# Altium PCB AirPort_V1.0.PcbDoc
Units mil, origin at the board's own origin, x right, y up, seen from the top; angles counter-clockwise.
Board outline 2235 x 1330 mil, 2 copper layers (Top Layer, Bottom Layer); 47 components, 18 nets, 128 pads, 94 vias.
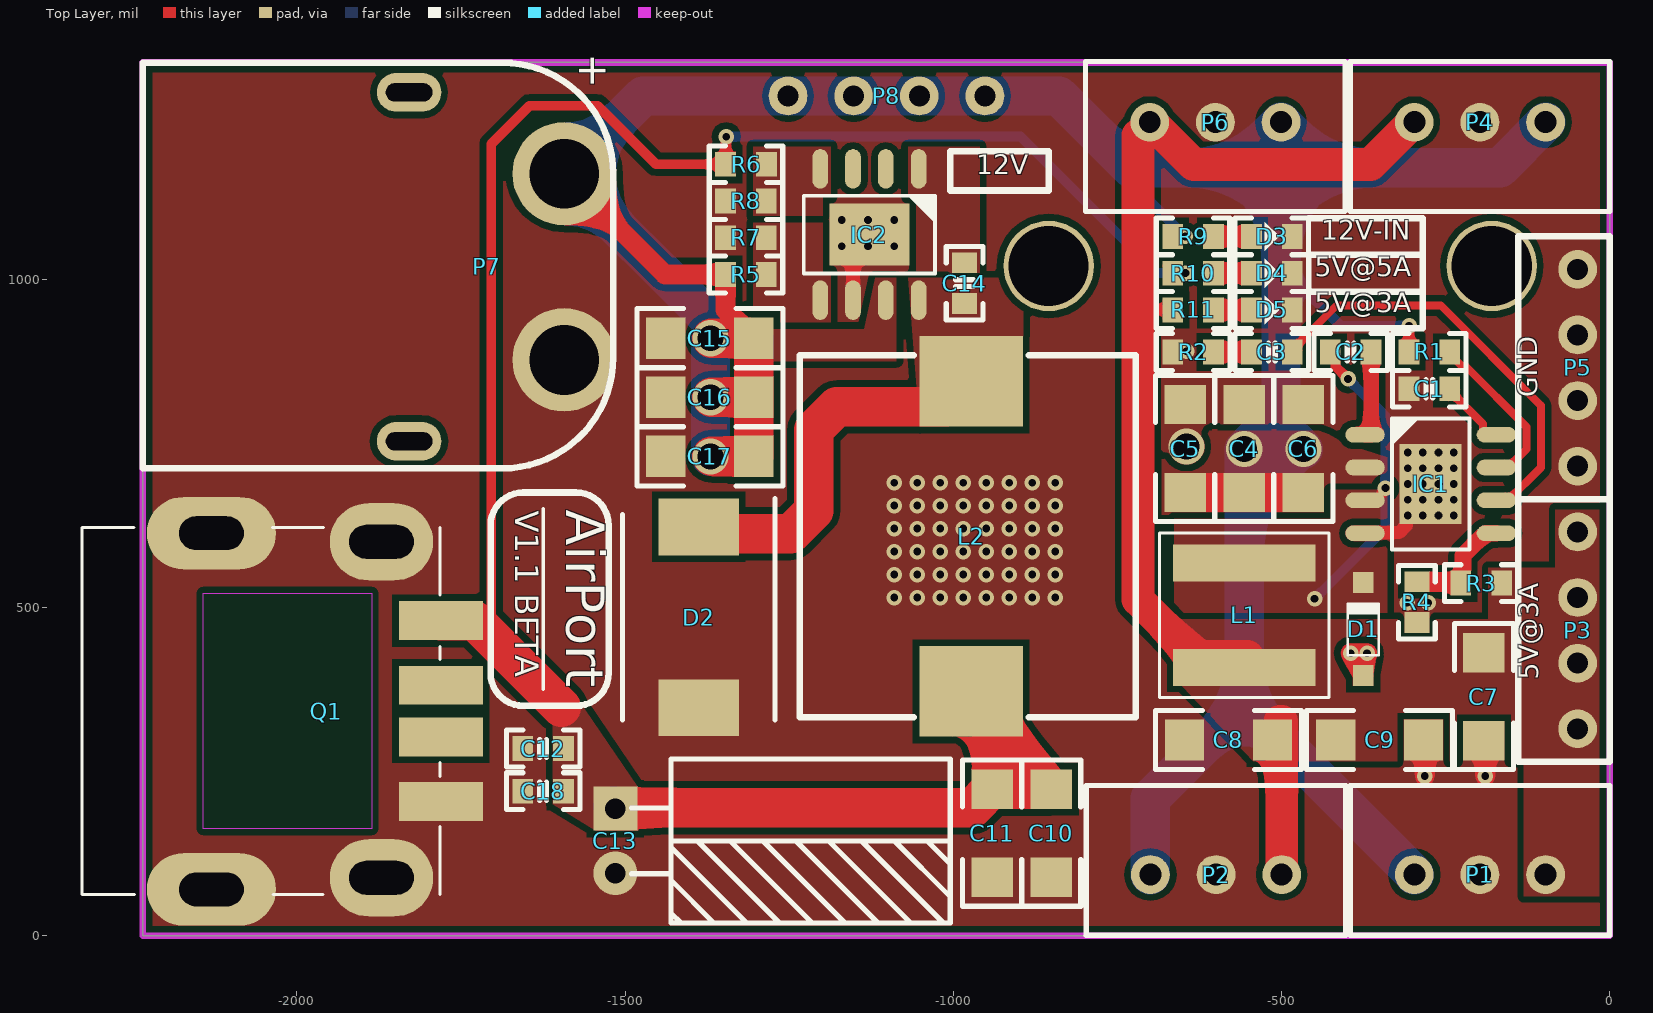
[diagram p0: Top Layer view]
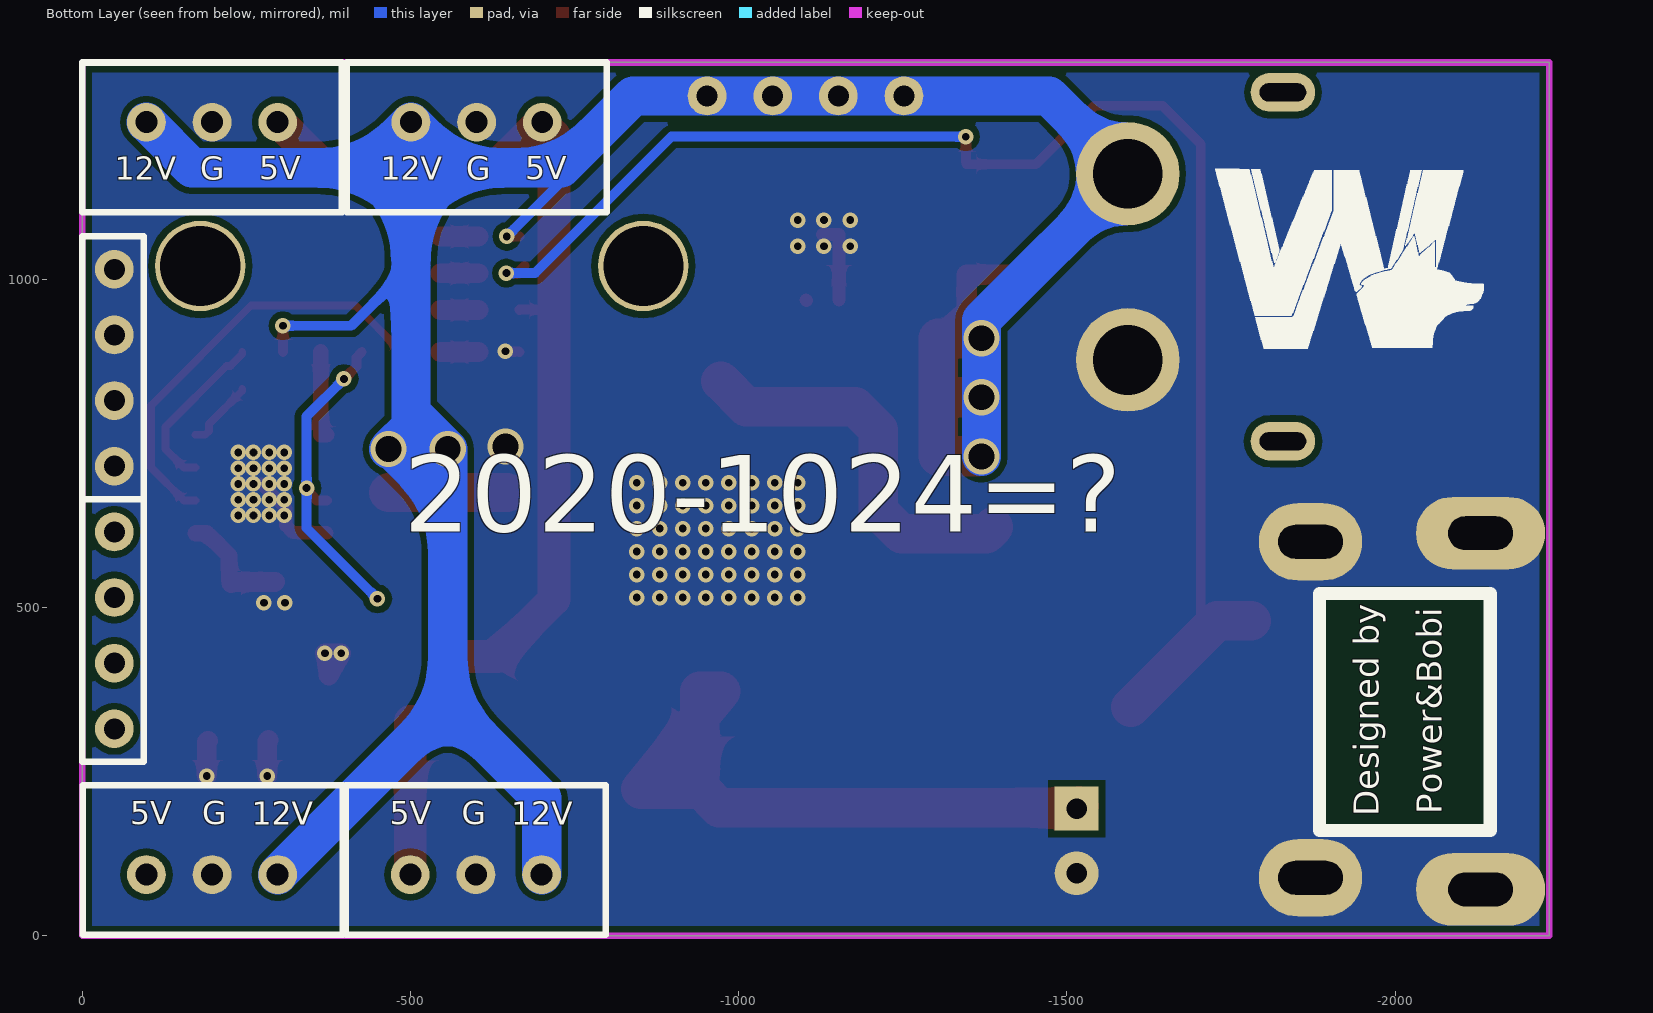
[diagram p1: Bottom Layer view, seen from below]
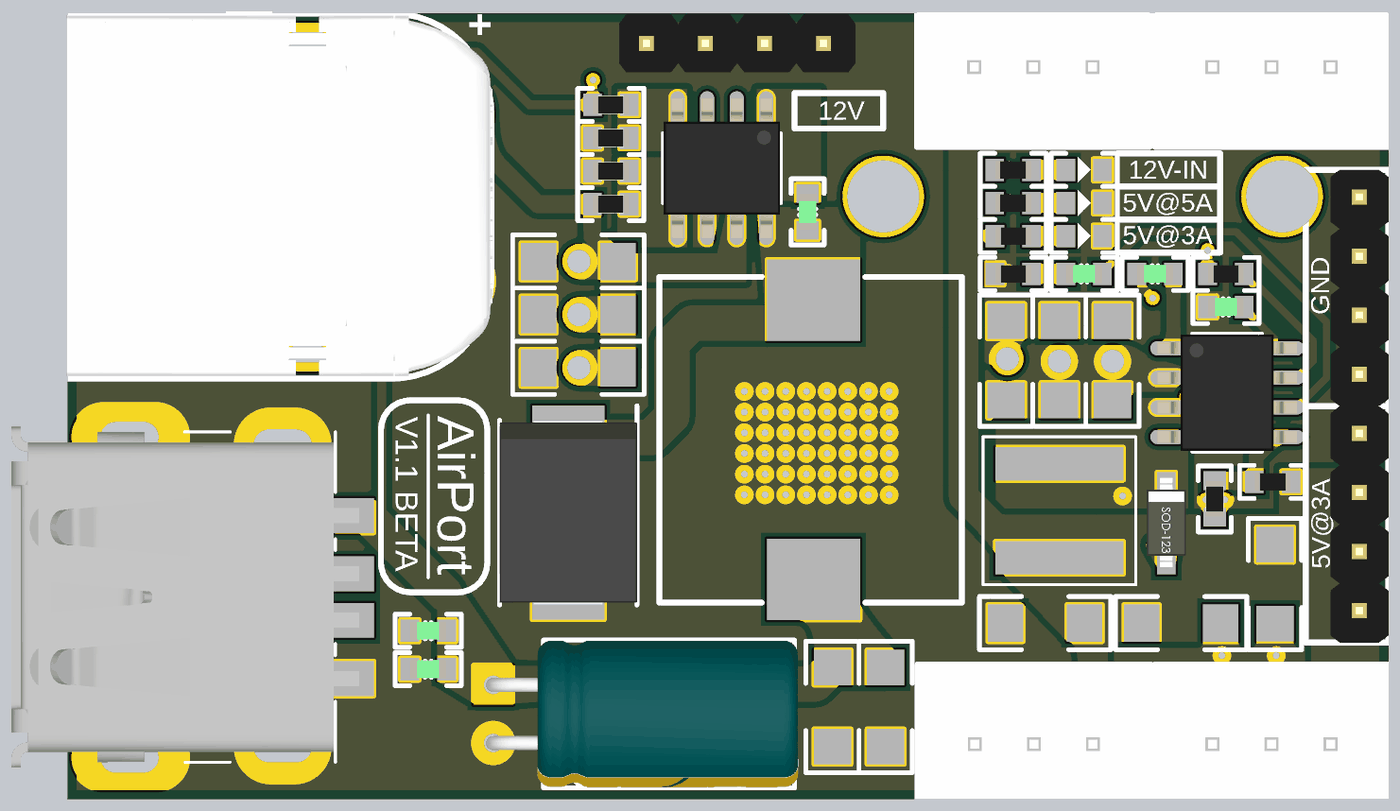
[diagram p2: 3D render of the assembled board from above, using the file's embedded part models]

## Layer stack, top to bottom
Top Solder: solder mask 0.4, Solder Resist, Dk 3.5
Top Layer: signal copper 1.4
Dielectric 1: dielectric 12.6, FR-4, Dk 4.8
Bottom Layer: signal copper 1.4
Bottom Solder: solder mask 0.4, Solder Resist, Dk 3.5

## Board outline
-2235,0 0,0 0,1330 -2235,1330

## Design rules (kind name [scope] priority, off if disabled: settings)
Clearance [All] p1: gap=10 ignorepadtopadclearanceinfootprint=FALSE except(0: Arc-Hole Track-Hole SMDPad-Hole THPad-Hole Via-Hole Fill-Hole Poly-Hole Region-Hole Text-Hole)
PlaneConnect [All] p1: planeconnectstyle=Direct reliefexpansion=20 reliefentries=4 reliefconductorwidth=10 reliefairgap=10
PolygonConnect [All] p1: connectstyle=Direct reliefconductorwidth=10 reliefentries=4 polygonreliefangle="90 Angle" airgapwidth=10
RoutingVias [All] p1: holewidth=11.81 width=23.62 viastyle="Through Hole" minholewidth=11.81 minwidth=23.62 maxholewidth=11.81 maxwidth=23.62
SolderMaskExpansion [All] p1: expansion=4 istentingtop=FALSE
Width [All] p1: maxlimit=100 minlimit=10 preferedwidth=15
29 further rules are at their usual default settings.

## Components (designator, comment, footprint, x,y, rotation, side; value= is the part's Value field where it differs from the comment)
C1 "100nF" CAP-0603 -275.1,833 r0 top
C2 "10nF" CAP-0603 -395,889 r0 top
C3 "6.8nF" CAP-0603 -515,889 r0 top
C4 "10uF" CAP-1206 -557,741.93 r270 top
C5 "10uF" CAP-1206 -647,741.93 r270 top
C6 "10uF" CAP-1206 -467,741.93 r270 top
C7 "10uF" CAP-1206 -192,364.05 r90 top
C8 "10uF" CAP-1206 -581,298 r0 top
C9 "10uF" CAP-1206 -351,298 r180 top
C10 "10uF" CAP-1206 -851,156.07 r90 top
C11 "10uF" CAP-1206 -941,156.07 r90 top
C12 "0.01uF" CAP-0603 -1625,285 r0 top
C13 "330uF" "CAP-2.5*6.3*11.2-H - GD" -1515,144.21 r270 top
C14 "0.01uF" CAP-0603 -983,993.87 r90 top
C15 "4.7uF" CAP-1206 -1371,910 r0 top
C16 "4.7uF" CAP-1206 -1371,820 r0 top
C17 "0.01uF" CAP-1206 -1371,730 r0 top
C18 "0.01uF" CAP-0603 -1625,220 r0 top
D1 "1N4007" SOD_123 -376,467 r270 top
D2 "B540C" DO-214AB -1388,484.8 r270 top
D3 "RED" LED-0603 -515,1065 r0 top
D4 "RED" LED-0603 -514.9,1009 r0 top
D5 "RED" LED-0603 -515,953 r0 top
IC1 "MP1484" SOIC_8_PAD -273,688 r270 top
IC2 "TPS5450DDA" SOIC_8_PAD -1128,1067.94 r180 top
L1 "10uH" XAL6060-103MEB -557,488 r90 top
L2 "15uH" SMD-13.45x12.6x4.8mm -963.17,609.22 r270 top locked
P1 "XH-3AW" XH_3 -198,93 r0 top
P2 "XH-3AW" XH_3 -600,93 r0 top
P3 "HDR1x4_2.54" HDR1x4_2.54_180 -49.18,615 r0 top
P4 "XH-3AW" XH_3 -198,1239 r180 top
P5 "HDR1x4_2.54" HDR1x4_2.54_180 -49.18,1015 r0 top
P6 "XH-3AW" XH_3 -601,1239 r180 top
P7 "XT60PW-M" XT60PW-M -1593,877 r90 top
P8 "HDR1x4_2.54" HDR1x4_2.54_180 -1252,1279 r90 top
Q1 "USB A" USB_A_MALE_4_POS_Solder_RA_SMD_4_Terminal_1_Port -1870.28,342 r270 top
R1 "100K" R-0603 -275.1,889 r180 top
R2 "6.8K" R-0603 -635,889 r180 top
R3 "44.2K" R-0603 -196.1,537 r0 top
R4 "10K" R-0603 -294,508 r90 top
R5 "15K" R-0603 -1316.1,1007 r180 top
R6 "10K" R-0603 -1316,1175 r0 top
R7 "10K" R-0603 -1316.1,1063 r180 top
R8 "3.16K" R-0603 -1316.1,1119 r0 top
R9 "10k" R-0603 -635.1,1065 r180 top
R10 "10k" R-0603 -635.1,1009 r180 top
R11 "10k" R-0603 -635,953 r180 top

## Footprints (in the part's own frame and the unit in brackets; to place one, negate y for a bottom-side part, rotate by r counter-clockwise, add the part's x,y. Pads: shape width x height; smd on the part's side, far side on the other; paste and mask are expansions set on the pad)
"CAP-2.5*6.3*11.2-H - GD" [mm] "脚距2.5mm直径6.3mm高度11.2mm"
  rect 1.7x1.7 hole 0.8: 1(-1.25,0)
  round 1.7 hole 0.8: 2(1.25,0)
  silkscreen extent -3.18,0.63 3.17,12.95, body extent -3.15,-0.3 3.16,13.11, height 6.32
CAP-0603 [mm]
  rect 0.8x0.96 smd: 1(-0.79,0) 2(0.79,0)
  silkscreen extent -1.42,-0.71 1.42,0.71, body extent -0.76,-0.39 0.76,0.39, height 0.9
CAP-1206 [mm] "贴片元件"
  rect 1.524x1.6 smd: 1(-1.703,0) 2(1.7,0)
  silkscreen extent -2.83,-1.14 2.83,1.14, body extent -1.91,-0.89 1.91,0.89, height 1
DO-214AB [mm]
  rect 2.2x3.1 smd: 1(3.5,0) 2(-3.5,0)
  silkscreen extent -4.6,-2.95 3.97,2.95, body extent -3.97,-2.95 3.97,2.95, height 2.5
HDR1x4_2.54_180 [mm]
  round 1.5 hole 0.813: 1(0,0) 2(0,-2.54) 3(0,-5.08) 4(0,-7.62)
  body extent -1.25,-8.89 1.25,1.27, height 8.2
LED-0603 [mm]
  rect 0.8x0.96 smd: 1(-0.79,0) 2(0.79,0)
  silkscreen extent -1.42,-0.71 1.42,0.71, body extent -0.81,-0.4 0.81,0.4, height 0.6
R-0603 [mm]
  rect 0.8x0.96 smd: 1(-0.79,0) 2(0.79,0)
  silkscreen extent -1.42,-0.71 1.42,0.71, body extent -0.76,-0.38 0.76,0.38, height 0.41
SMD-13.45x12.6x4.8mm [mm]
  rect 3.5x4 smd: 1(-5.975,-0.25) 2(6.025,-0.25)
  silkscreen extent -6.98,-6.88 7.03,6.12, body extent -6.96,-6.88 7.01,6.08, height 5
SOD_123 [mm]
  rect 0.8x0.8 smd: 1(1.8,0) 2(-1.8,0)
  silkscreen extent -1.02,-0.6 1.02,0.6, body extent -1.95,-0.85 1.9,0.85, height 1.42
SOIC_8_PAD [mil]
  oval 24x60 smd: 1(-75,-100) 2(-25,-100) 3(25,-100) 4(75,-100) 5(75,100) 6(25,100) 7(-25,100) 8(-75,100)
  rect 122.05x94.49 smd: 9(0,0)
  silkscreen extent -100,-59 100,59, body extent -98,-118 98,118, height 71
USB_A_MALE_4_POS_Solder_RA_SMD_4_Terminal_1_Port [mm] "能过5A大电流：https://item.taobao.com/item.htm?spm=a1z0d.6639537.1997196601.4.56bb7484TiP584&id=575662474806"
  rect 1.5x3.25 smd: 1(-3.5,2.27) 2(-1,2.27) 3(1,2.27) 4(3.5,2.27)
  oval 2.8x5 hole 1.3 slot 2.5 at 90 deg: ""(-6.883,-6.604) ""(6.9,-6.604)
  oval 3x4 hole 1.3 slot 2.5 at 90 deg: ""(-6.55,-0.025) ""(6.45,-0.025)
  Keep-Out Layer region: 4.55,-6.914 -4.553,-6.914 -4.553,-0.41 4.55,-0.41
  silkscreen extent -7.1,-11.61 7.1,2.24, body extent -7.32,-11.68 7.31,3.26, height 7.63
XAL6060-103MEB [mm]
  rect 1.43x5.5 smd: 1(-2.02,0) 2(2.02,0)
  silkscreen extent -3.18,-3.28 3.18,3.28, body extent -3.18,-3.28 3.18,3.25, height 3
XH_3 [mm]
  round 1.5 hole 0.85: 1(-2.54,0) 2(0,0) 3(2.54,0)
  silkscreen extent -5.02,-2.35 5.02,3.45, body extent -5.02,-2.35 5.02,3.45, height 7.21
XT60PW-M [mm]
  oval 1.5x2.5 hole 0.7 slot 1.8 at 90 deg: 0(-3.15,6) 0(10.35,6)
  round 4 hole 2.7: 1(7.2,0) 2(0,0)
  silkscreen extent -4.2,-1.9 11.5,16.3, body extent -4.3,-1.95 11.6,16.35, height 8.45

## Part data
C1 C2 C3 C4 C5 C6 C7 C8 C9 C10 C11 C12 C14 C15 C16 C17 C18: library part CAP, "贴片电容", Package=0402, SuppliersPartNumber=C52923, ComponentLink1Description=供应商链接, ComponentLink1URL=http://www.szlcsc.com/product/details_53938.html, Supplier=LC
C13: library part CAP-POL, "贴片电容-有极性", Package=3528, SuppliersPartNumber=C16133, ComponentLink1Description=供应商链接, ComponentLink1URL=http://www.szlcsc.com/product/details_16815.html, Supplier=LC
D1: library part DIODE, "M7 二极管", Package=SMA(DO-214AC), SuppliersPartNumber=C22452, ComponentLink1Description=供应商链接, ComponentLink1URL=http://www.szlcsc.com/product/details_23178.html, Supplier=LC
D2: library part DIODE, "二极管", Package=SMA(DO-214AC), SuppliersPartNumber=C22452, ComponentLink1Description=供应商链接, ComponentLink1URL=http://www.szlcsc.com/product/details_23178.html, Supplier=LC
D3 D4 D5: library part LED, "发光二极管", Package=0603, SuppliersPartNumber=C2290, ComponentLink1Description=供应商链接, ComponentLink1URL=http://www.szlcsc.com/product/details_2663.html, Supplier=LC
IC1: "同步降压稳压器", Manufacturer_Name="Monolithic Power Systems (MPS)", Manufacturer_Part_Number=MP1484EN-LF, Mouser Part Number=946-MP1484ENLF, Datasheet Link=http://www.mouser.com/datasheet/2/277/MP1484-1186021.pdf, Height=1.7mm, Mouser Price/Stock=https://www.mouser.com/Search/Refine.aspx?Keyword=946-MP1484ENLF
IC2: "集成稳压芯片", Manufacturer_Name="Texas Instruments", Mouser Part Number=595-TPS5450DDA, Arrow Part Number=TPS5450DDA, Arrow Price/Stock=https://www.arrow.com/en/products/tps5450dda/texas-instruments, Datasheet Link=http://www.ti.com/lit/ds/symlink/tps5450.pdf, Height=1.7mm, Manufacturer_Part_Number=TPS5450DDA, Mouser Price/Stock=https://www.mouser.co.uk/ProductDetail/Texas-Instruments/TPS5450DDA?qs=h%2FYsCRHtaqPow3uMxnjN5A%3D%3D
L1: library part INDUCTOR, "贴片电感 5A", Package=0402, SuppliersPartNumber=C32041, ComponentLink1Description=供应商链接, ComponentLink1URL=http://www.szlcsc.com/product/details_33003.html, Supplier=LC
L2: library part INDUCTOR, "8A 贴片电感CMKD-1350A-150M", Package=0402, SuppliersPartNumber=C32041, ComponentLink1Description=供应商链接, ComponentLink1URL=http://www.szlcsc.com/product/details_33003.html, Supplier=LC
P1 P2 P4 P6: library part HDR1x3_2.54, "Header"
P3 P5 P8: "Header"
P7: library part XT60, "XT60"
Q1: "USB 接口"
R1 R2 R3 R4 R5 R6 R7 R8 R9 R10 R11: library part RES, "贴片电阻", Package=0805, SuppliersPartNumber=C17798, Supplier=LC

## Free pads (board coordinates)
  round 137.8 hole 122.05: 2(-855,1020) 2(-180,1020)

## Via types
v1: diameter 23.62, hole 11.81, Top Layer to Bottom Layer, 88 vias
v2: diameter 55.12, hole 39.37, Top Layer to Bottom Layer, 6 vias

## Nets (pads, with @x,y where several pads share a name; then routed paths per layer and width w, separated by ;. In a path a pad name is that pad's centre, name@x,y a point inside that pad or via, vN(x,y) a via of type N, cw(c..) or ccw(c..) an arc to the next point about the centre after c; other vN are vias at no path point)
5V@3A: C7.2 C8.2 C9.2 L1.1 P1.3 P2.3 P3.1 P3.2 P3.3 P3.4 P4.3 P6.3 R3.2 R11.2 | length 1677.4
  Top Layer w15: -713,954 -712.5,953.5 -666.6,953.5 R11.2
  Top Layer w50: L1.1@-552,425 -632.12,425 -719,511.88 -719,954 -719,1218.55 -701,1236.55 P6.3 -698.55,1239 -634.02,1174.47 -364.98,1174.47 -300.45,1239 P4.3 ; C8.2@-503.07,326 -500,326 P2.3
5V@5A: C10.2 C11.2 C12.2 C13.1 C18.2 L2.2 Q1.1 R6.1 R10.2 | length 3456.4
  Top Layer w15: -1704,466 -1704,1206 -1646,1264 -1542.25,1264 -1453.25,1175 R6.1 ; -1670.93,432.93 -1597.26,359.26 -1597.26,347.8 ; R6.1@-1346.55,1178.7 -1346.55,1216.45 v1(-1346,1217) ; R10.2@-674.45,1020.35 -666.2,1012.1 R10.2 -665.7,1008.5 R10.2@-661.69,1008.5 ; R10.2@-662.19,1008 R10.2@-661.69,1008.5 ; R10.2@-661.69,1008.5 -645.5,1008.5 -646.25,1009.25 v1(-646.38,1009.25) -660.94,1009.25 R10.2@-661.69,1008.5
  Top Layer w30: C13.1@-1526.89,196.89 C13.1
  Top Layer w60: Q1.1 -1729.26,479.8 -1700.36,450.9 -1676.93,427.47 -1676.93,426.93 ; -1676.66,427.2 -1597.26,347.8 ; C13.1@-1518.46,196.89 C13.1 -1513.43,195 -970.5,195 -942.5,223 C11.2 ; C11.2 L2.2@-941,332.92 ; C11.2 C10.2 -887.12,267.12 L2.2@-941,332.92 ; L2.2@-941,332.92 -941,372 L2.2 -960.16,356.31 L2.2@-941,332.92
  Bottom Layer w15: v1(-1346,1217) -898,1217 -690.25,1009.25 v1(-646.38,1009.25)
12V: C4.2 C5.2 C6.2 C15.2 C16.2 C17.2 IC1.2 IC2.7 P1.1 P2.1 P4.1 P6.1 P7.1 P8.1 P8.2 P8.3 P8.4 R1.2 R5.2 R9.2 | length 5802.7
  Top Layer w15: R9.2 v1(-647,1065) ; R1.2 -306.2,929 v1(-306,929)
  Top Layer w20: C15.2 C15.2@-1299.07,905 ; IC2.7@-1103.77,967.17 IC2.7
  Top Layer w30: P7.1 -1439.54,1007 R5.2 -1347.2,953.13 C15.2@-1320.57,926.5
  Top Layer w60: v2@-1368.05,730 C17.2 C16.2 ; v2@-1368.05,820 C16.2 ; v2@-1368.05,910 C15.2 C16.2 ; C5.2 C4.2 C6.2
  Bottom Layer w15: -729.8,1169.47 -729.8,1147.8 v1(-647,1065) ; -501,1020 -410,929 v1(-306,929)
  Bottom Layer w60: v2(-1370,730.02) v2(-1370,820) v2(-1370,910.02) -1370,937.46 P7.1 -1591.44,1160.46 -1472.9,1279 P8.1 P8.2 P8.3 P8.4 -839.33,1279 -729.8,1169.47 -570.53,1169.47 ; P2.1 -700,209 -557,352 ; P1.1 -557,352 ; P4.1 -167.53,1169.47 -431.47,1169.47 ; -570.53,1169.47 -501,1099.94 ; -570.53,1169.47 -501,1169.47 ; -570.53,1169.47 P6.1 ; -557,352 -557,655 ; -557,655 v2(-557,741) ; -557,655 v2@-471,741 ; v2(-557,741) v2@-471,741 ; v2(-557,741) -501,797 ; -501,797 -501,1020 -501,1099.94 ; -501,797 -501,775 v2(-467,741) v2@-471,741 ; -501,1099.94 -431.47,1169.47 ; -501,1099.94 -501,1169.47 ; -501,1169.47 P6.1 ; -501,1169.47 -431.47,1169.47 ; P6.1 -431.47,1169.47
GND: C1.1 C4.1 C5.1 C6.1 C7.1 C8.1 C9.1 C10.1 C11.1 C12.1 C13.2 C15.1 C16.1 C17.1 C18.1 D1.1 D2.1 D3.2 D4.2 D5.2 IC1.4 IC1.9 IC2.6 IC2.9 P1.2 P2.2 P4.2 P5.1 P5.2 P5.3 P5.4 P6.2 P7.2 Q1. Q1.4 R2.2 R4.1 R7.2 R8.1 | length 502.8
  Top Layer w15: R2.2 -665.6,889.5 -645.5,889.5 v1(-645,890)
  Top Layer w20: IC2.6 -1153,1067.94 IC2.9 ; IC1.4 -372.23,613.77 -321.23,613.77 -310.24,624.76 -310.24,650.76 IC1.9
  Top Layer w30: D1.1@-375.23,396.9 D1.1 ; C9.1 -281.93,295.98 v1(-281.93,243) ; C7.1 -190,295 v1(-190,242.98) ; D1.1 -370.76,425.71 v1(-370,430) v1(-395,430) -389.01,419.33 D1.1
  other v1: -309,507 -277,507 -1090,515 -1055,515 -1020,515 -985,515 -950,515 -915,515 -880,515 -845,515 -1090,550 -1055,550 -1020,550 -985,550 -950,550 -915,550 -880,550 -845,550 -1090,585 -1055,585 -1020,585 -985,585 -950,585 -915,585 -880,585 -845,585 -1090,620 -1055,620 -1020,620 -985,620 -950,620 -915,620 -880,620 -845,620 -308,640 -285,640 -261,640 -238,640 -1090,655 -1055,655 -1020,655 -985,655 -950,655 -915,655 -880,655 -845,655 -308,664 -285,664 -261,664 -238,664 -308,688 -285,688 -261,688 -238,688 -1090,690 -1055,690 -1020,690 -985,690 -950,690 -915,690 -880,690 -845,690 -308,712 -285,712 -261,712 -238,712 -308,736 -285,736 -261,736 -238,736 -1170,1050 -1130,1050 -1090,1050 -1170,1090 -1130,1090 -1090,1090
  other v2: -645,745
NetC1_2: C1.2 IC1.8 | length 108.1
  Top Layer w12: C1.2 -244,829.85 -193.3,779.15 -193.3,768.54 -187.75,763 IC1.8
NetC2_1: C2.1 D1.2 IC1.3 L1.2 | length 496.2
  Top Layer w15: C2.1 -417.85,880.75 -417.85,866.85 v1(-399,848) ; IC1.3 -357.44,663 -343.7,676.73 -343.7,680.12 v1(-342.06,681.77)
  Bottom Layer w15: v1(-450,513) -342.06,620.94 v1(-342.06,681.77) -342.06,791.06 v1(-399,848)
NetC2_2: C2.2 IC1.1 | length 135
  Top Layer w23.62: IC1.1 -364.07,763 -363.9,763.17 C2.2
NetC3_1: C3.1 R2.1 | length 57.8
  Top Layer w30: R2.1 C3.1
NetC3_2: C3.2 IC1.6 | length 656.4
  Top Layer w12: C3.2 -483.9,892.15 -416.05,960 -257.73,960 -105,807.27 -105,713 -155,663 IC1.6
NetC14_1: C14.1 D2.2 IC2.8 L2.1 | length 587.9
  Top Layer w60: D2.2 -1377.41,612 -1248.15,612 -1213,647.15 -1213,770.4 -1177.85,805.54 -1011.9,805.54 L2.1
NetC14_2: C14.2 IC2.1
NetD3_A: D3.1 R9.1 | length 57.9
  Top Layer w30: R9.1 D3.1
NetD4_A: D4.1 R10.1 | length 58
  Top Layer w30: R10.1 D4.1
NetD5_A: D5.1 R11.1 | length 57.8
  Top Layer w30: R11.1 D5.1
NetIC1_5: IC1.5 R3.1 R4.2 | length 176.6
  Top Layer w25: R3.1 -223.96,540.25 -223.96,579.04 -190,613 IC1.5
  Top Layer w30: R4.2 -293.52,538.62 -227.95,538.62 -227.2,537.88 R3.1
NetIC1_7: IC1.7 R1.1 | length 257.4
  Top Layer w12: R1.1 -244,885.85 -226.05,867.9 -220.3,867.9 -127,774.6 -127,741 -155,713 IC1.7
NetIC2_4: IC2.4 R6.2 R8.2
NetIC2_5: IC2.5 R5.1 R7.1
pads on no net: IC2.2 IC2.3 P7.0 Q1.2 Q1.3

## Polygon pours and split planes (outlines as drawn)
GND on Top Layer "GND_L01_P039" (solid, remove dead copper, pour order 39): -2491,1577 -2491,-233 284,-233 284,1727 289,1727
no net on Top Layer "NONET_L01_P041" (solid, pour order 41): -150.5,265.95 -131,265.95 -131,266
5V@5A on Top Layer "5V@5A_L01_P038" (solid, pour order 38): -1610,325 -1610,200 -1545,160 -1480,160 -1480,225 -1575,365
NetC2_1 on Top Layer "NETC2_1_L01_P021" (solid, pour order 21): -339,679 -664,679 -664,492 -339,492
12V on Top Layer "12V_L01_P032" (solid, pour order 32): -1119,1002 -1087,1002 -1087,875 -1333.89,875 -1333.89,924 -1136,924
12V on Top Layer "12V_L01_P031" (solid, pour order 31): -431,641 -339,705 -339,729 -408,750 ccw(c-463.35,688.08) -468,771 -683,771 -683,641
NetC14_2 on Top Layer "NETC14_2_L01_P028" (solid, pour order 28): -1069,1202 -960.07,1202 -960.07,1005.46 -1069,1005.46
NetC14_1 on Top Layer "NETC14_1_L01_P027" (solid, pour order 27): -1069,1002 -894,1002 -894,912.78 -1051,775
NetIC2_4 on Top Layer "NETIC2_4_L01_P026" (solid, pour order 26): -1305,1202 -1305,1096 -1187,1096 -1187,1202
NetIC2_5 on Top Layer "NETIC2_5_L01_P025" (solid, pour order 25): -1305,1086 -1187,1086 -1187,934 -1305,934
5V@3A on Top Layer "5V@3A_L01_P023" (solid, pour order 23): -16,282 -16,60 -131,60 -131,282
5V@3A on Top Layer "5V@3A_L01_P022" (solid, remove dead copper, pour order 22): -664,482 -185,482 -185,560 -83,560 -83,649 -16,649 -16,265.95 -543,265.95 -664,393
GND on Bottom Paste "NONET_L02_P-001" (solid): -1230,1125 -1230,1010 -1030,1010 -1030,1125
GND on Bottom Paste "NONET_L02_P-001" (solid): -320,785 -320,590 -215,590 -215,785
GND on Bottom Layer "GND_L02_P040" (solid, remove dead copper, pour order 40): -2606,1612 -2606,-293 299,-293 299,1652

## Keep-outs
Keep-Out Layer:
  the board outline again, w10

## Silkscreen, mask and mechanical layers (free items; w line width, h text height)
Top Overlay:
  lines w5: -1625,375 -1625,650
  lines w10: -459,925 -285,925 -285,1093 -459,1093 ; -459,981 -285,981 -285,1037 -459,1037 ; -140,665 -140,1065 0,1065 0,665 ; -140,665 -140,265 0,265 0,665 ; -140,665 -130,665 0,665 ; -1705,400 ccw(c-1655,400) -1655,350 -1575,350 ccw(c-1575,400) -1525,400 -1525,550 -1525,625 ccw(c-1575,625) -1575,675 -1655,675 ccw(c-1655,625) -1705,625 -1705,400 ; -1005,1135 -855,1135 -855,1195 -1005,1195 -1005,1135
  text "12V" at -965,1150 h50
  text "12V-IN" at -440,1050 h50
  text "5V@5A" at -450,994.4 h50
  text "5V@3A" at -450,939.4 h50
  text "GND" at -100.52,820 h50 r90
  text "AirPort" at -1608.96,648.84 h100 r270
  text "V1.1 BETA" at -1680,647.27 h61 r270
  text "5V@3A" at -99.4,390 h50 r90
Bottom Overlay:
  drawing of 1766 lines, arcs and shapes, not listed
  text "5V" at -675.34,1140.37 h60
  text "G" at -585.34,1140.04 h60
  text "12V" at -455.34,1140 h60
  text "5V" at -270,1140.37 h60
  text "G" at -180,1140.04 h60
  text "12V" at -50,1140 h60
  text "2020-1024=?" at -489.86,577.08 h200
  text "Power&Bobi" at -2084.05,184.85 h65 r270
  text "Designed by" at -1987.78,181.51 h65 r270
  text "12V" at -653.45,157.75 h60
  text "G" at -578.45,158.37 h60
  text "5V" at -468.45,158.37 h60
  text "12V" at -258.45,157.75 h60
  text "G" at -183.45,158.37 h60
  text "5V" at -73.45,158.37 h60
Mechanical 1:
  the board outline again, w10

## Text inside footprints (layer, text, board x,y; h text height)
P7: Top Overlay "+" at -1514.26,1290.39 h78.74 r90